# EAGLE board zif_to_dsub (EAGLE 7.2.0)
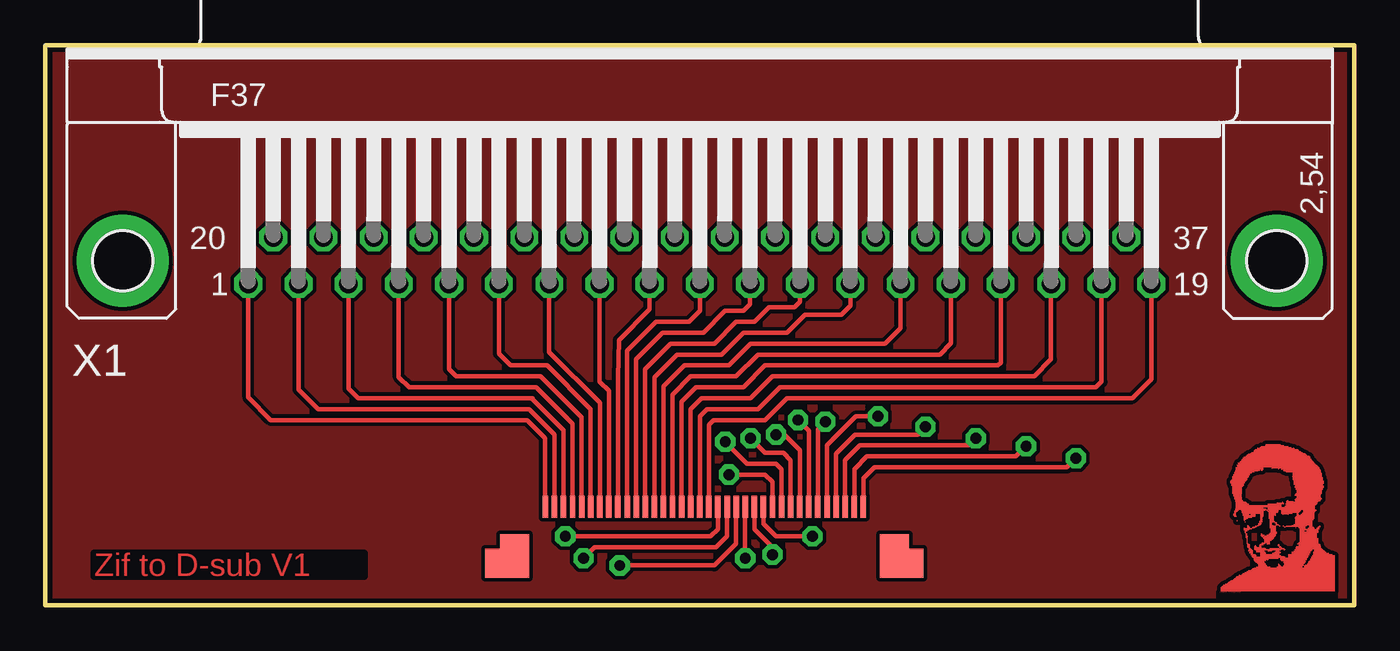
[diagram p0: board, top side]
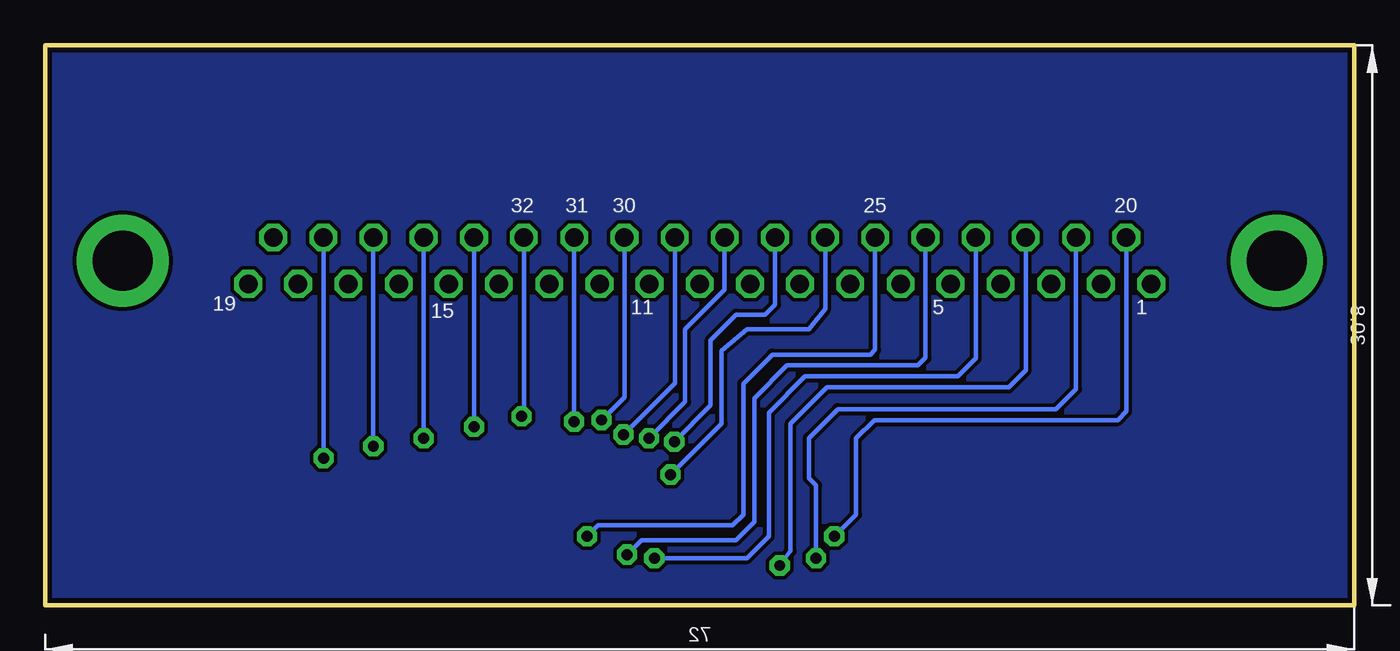
[diagram p1: board, bottom side, seen from below]

Size 72 x 30.8 mm. Coordinates in mm from the lower left corner, seen from the top.
Outline: 0,0 72,0 72,30.8 0,30.8 0,0
Copper layers (1*16): Top 0.035mm / dielectric 1.5mm / Bottom 0.035mm
Design rules "pcbtrain": minimum track width 0.2mm, minimum drill 0.4mm, track to track 0.2mm, track to pad 0.2mm, pad to pad 0.2mm, via to via 0.2mm, smd to smd 0mil, copper to edge 10mil, drill to drill 0.2mm, minimum pad ring 10mil, minimum via ring 10mil, stop-mask expansion 0.125mm, vias tented up to drill 0mil, thermal gap 10mil

## Footprints (pad centres in the part's own frame; a part is rotated, then mirrored left to right if it is on the bottom)
ZIF_CONNECTOR_36 = smd 0.3 x 1.2: P1 -8.5,0; P2 -8,0; P3 -7.5,0; P4 -7,0; P5 -6.5,0; P6 -6,0; P7 -5.5,0; P8 -5,0; P9 -4.5,0; P10 -4,0; P11 -3.5,0; P12 -3,0; P13 -2.5,0; P14 -2,0; P15 -1.5,0; P16 -1,0; P17 -0.5,0; P18 0,0; P19 0.5,0; P20 1,0; P21 1.5,0; P22 2,0; P23 2.5,0; P24 3,0; P25 3.5,0; P26 4,0; P27 4.5,0; P28 5,0; P29 5.5,0; P30 6,0; P31 6.5,0; P32 7,0; P33 7.5,0; P34 8,0; P35 8.5,0; P36 9,0; P$2 0.5,0; P$3 1,0; P$4 1.5,0; P$8 3.5,0; P$10 4.5,0; P$17 -1,0; P$18 -0.5,0; P$19 -2,0; P$20 -1.5,0; P$21 -2.5,0; P$22 -3,0; P$23 -3.5,0; P$24 -4,0; P$25 -4.5,0; P$26 -5,0; P$27 -5.5,0; P$28 -6,0; P$29 -6.5,0; P$30 -7,0; P$31 -7.5,0; P$34 8.5,0; P$36 -8.5,0; P$41 0,0; P$42 0.5,0; P$43 1,0; P$44 1.5,0; P$45 2,0; P$46 2.5,0; P$47 3,0; P$48 3.5,0; P$49 4,0; P$50 4.5,0; P$51 5,0; P$52 5.5,0; P$53 6,0; P$54 6.5,0; P$55 7,0; P$56 7.5,0; P$57 -1,0; P$58 -0.5,0; P$59 -2,0; P$60 -1.5,0; P$61 -2.5,0; P$62 -3,0; P$63 -3.5,0; P$64 -4,0; P$65 -4.5,0; P$66 -5,0; P$67 -5.5,0; P$68 -6,0; P$69 -6.5,0; P$70 -7,0; P$71 -7.5,0; P$72 8,0; P$73 -8,0; P$74 8.5,0; P$75 9,0; P$76 -8.5,0; P$81 0,0; P$85 2,0; P$86 2.5,0; P$87 3,0; P$89 4,0; P$91 5,0; P$92 5.5,0; P$93 6,0; P$94 6.5,0; P$95 7,0; P$96 7.5,0; P$112 8,0; P$113 -8,0; P$115 9,0 | smd 1.6 x 2.4: P$37 10.7,-2.7; P$38 -10.2,-2.7; P$77 10.7,-2.7; P$78 -10.2,-2.7; P$117 10.7,-2.7; P$118 -10.2,-2.7 | smd 0.8 x 1.6: P$39 -11.4,-3.1; P$40 11.9,-3.1; P$79 -11.4,-3.1; P$80 11.9,-3.1; P$119 -11.4,-3.1; P$120 11.9,-3.1
F37HP = drill 1.016 octagon: 1 -24.841,-1.27; 2 -22.073,-1.27; 3 -19.329,-1.27; 4 -16.561,-1.27; 5 -13.792,-1.27; 6 -11.049,-1.27; 7 -8.28,-1.27; 8 -5.512,-1.27; 9 -2.769,-1.27; 10 0,-1.27; 11 2.769,-1.27; 12 5.512,-1.27; 13 8.28,-1.27; 14 11.049,-1.27; 15 13.818,-1.27; 16 16.561,-1.27; 17 19.329,-1.27; 18 22.098,-1.27; 19 24.841,-1.27; 20 -23.47,1.27; 21 -20.701,1.27; 22 -17.932,1.27; 23 -15.189,1.27; 24 -12.421,1.27; 25 -9.652,1.27; 26 -6.909,1.27; 27 -4.14,1.27; 28 -1.372,1.27; 29 1.372,1.27; 30 4.14,1.27; 31 6.909,1.27; 32 9.677,1.27; 33 12.421,1.27; 34 15.189,1.27; 35 17.958,1.27; 36 20.701,1.27; 37 23.47,1.27 | drill 3.302 pad 5.08: G1 -31.75,0; G2 31.75,0

## Placement (x,y rotation side)
U$1  ZIF_CONNECTOR_36  [ZIF_CONNECTOR_36]  36,5.43 0 top
X1  [F37HP]  36,18.96 0 top

## Library data of the parts
U$1 = mayo_parts2
X1 = con-subd; OC_FARNELL: unknown; OC_NEWARK: unknown

## Nets
N$1: U$1.P1 X1.1
N$2: U$1.P2 X1.2
N$3: U$1.P3 X1.3
N$4: U$1.P4 X1.4
N$5: U$1.P5 X1.5
N$6: U$1.P6 X1.6
N$7: U$1.P7 X1.7
N$8: U$1.P8 X1.8
N$9: U$1.P9 X1.9
N$10: U$1.P10 X1.10
N$11: U$1.P11 X1.11
N$12: U$1.P12 X1.12
N$13: U$1.P13 X1.13
N$14: U$1.P14 X1.14
N$15: U$1.P15 X1.15
N$16: U$1.P16 X1.16
N$17: U$1.P17 X1.17
N$18: U$1.P18 X1.18
N$19: U$1.P19 X1.19
N$20: U$1.P20 X1.20
N$21: U$1.P21 X1.21
N$22: U$1.P22 X1.22
N$23: U$1.P23 X1.23
N$24: U$1.P24 X1.24
N$25: U$1.P25 X1.25
N$26: U$1.P26 X1.26
N$27: U$1.P27 X1.27
N$28: U$1.P28 X1.28
N$29: U$1.P29 X1.29
N$30: U$1.P30 X1.30
N$31: U$1.P31 X1.31
N$32: U$1.P32 X1.32
N$33: U$1.P33 X1.33
N$34: U$1.P34 X1.34
N$35: U$1.P35 X1.35
N$36: U$1.P36 X1.36

## Tracks (layer width: path | path; a pad name or v marks a point on that pad's centre or on a via)
N$1
  Top 0.254: U$1.P1 27.5,9.2 26.5,10.2 12.4,10.2 11.16,11.44 X1.1
N$2
  Top 0.254: U$1.P2 28,9.4 26.6,10.8 15,10.8 13.93,11.87 X1.2
N$3
  Top 0.254: U$1.P3 28.5,9.65 26.8,11.35 26.8,11.4 17.2,11.4 16.67,11.93 X1.3
N$4
  Top 0.254: U$1.P4 29,10 27,12 20,12 19.44,12.56 X1.4
N$5
  Top 0.254: U$1.P5 29.5,10.35 27.25,12.6 22.6,12.6 22.21,12.99 X1.5
N$6
  Top 0.254: U$1.P6 30,10.8 27.6,13.2 25.6,13.2 24.95,13.85 X1.6
N$7
  Top 0.254: U$1.P7 30.5,11.15 27.72,13.93 X1.7
N$8
  Top 0.254: U$1.P8 31,11.8 30.49,12.31 X1.8
N$9
  Top 0.254: U$1.P9 31.5,12.55 31.55,14.6 33.23,16.28 X1.9
N$10
  Top 0.254: U$1.P10 32,14 33.6,15.6 35.4,15.6 36,16.2 X1.10
N$11
  Top 0.254: U$1.P11 32.5,13.55 33.95,15 36.2,15 37.4,16.2 38.4,16.2 38.77,16.57 X1.11
N$12
  Top 0.254: U$1.P12 33,13 34.4,14.4 36.8,14.4 38,15.6 39,15.6 39.8,16.4 41.2,16.4 41.51,16.71 X1.12
N$13
  Top 0.254: U$1.P13 33.5,12.55 34.75,13.8 37.2,13.8 38.4,15 40.8,15 41.8,16 43.8,16 44.28,16.48 X1.13
N$14
  Top 0.254: U$1.P14 34,12.05 35.15,13.2 37.6,13.2 38.8,14.4 46.2,14.4 47.05,15.25 X1.14
N$15
  Top 0.254: U$1.P15 34.5,11.6 35.5,12.6 38,12.6 39.2,13.8 49.2,13.8 49.82,14.42 X1.15
N$16
  Top 0.254: U$1.P16 35,11.2 35.8,12 38.4,12 39.6,13.2 52.4,13.2 52.56,13.36 X1.16
N$17
  Top 0.254: U$1.P17 35.5,10.8 36.1,11.4 38.8,11.4 40,12.6 54.4,12.6 55.33,13.53 X1.17
N$18
  Top 0.254: U$1.P18 36,10.4 36.4,10.8 39.2,10.8 40.4,12 57.8,12 58.1,12.3 X1.18
N$19
  Top 0.254: U$1.P19 36.5,9.95 36.75,10.2 39.6,10.2 40.8,11.4 59.8,11.4 60.84,12.44 X1.19
N$20  (via drill 0.6 pad 0.25)
  Top 0.254: U$1.P20 37,4.2 36.6,3.8 v28.6,3.8
  Bottom 0.254: v28.6,3.8 27.4,5 27.4,9.2 26.4,10.2 13,10.2 12.53,10.67 X1.20
N$21  (via drill 0.6 pad 0.25)
  Top 0.254: U$1.P21 37.5,3.8 36.9,3.2 30.2,3.2 v29.6,2.6
  Bottom 0.254: X1.21 15.3,11.9 16.4,10.8 28.4,10.8 30,9.2 30,7 29.6,6.6 v29.6,2.6
N$22  (via drill 0.6 pad 0.25)
  Top 0.254: U$1.P22 38,3.4 36.8,2.2 v31.6,2.2
  Bottom 0.254: v31.6,2.2 31,3 31,10 29,12 19,12 18.07,12.93 X1.22
N$23  (via drill 0.6 pad 0.25)
  Top 0.254: U$1.P23 v38.5,2.6
  Bottom 0.254: v38.5,2.6 33.4,2.6 32.2,3.8 32.2,10.6 30.2,12.6 21.8,12.6 20.81,13.59 X1.23
N$24  (via drill 0.6 pad 0.25)
  Top 0.254: U$1.P24 39,4.2 40,3.2 v40,2.8
  Bottom 0.254: v40,2.8 39.2,3.6 34,3.6 33,4.6 33,11.4 31.2,13.2 24,13.2 23.58,13.62 X1.24
N$25  (via drill 0.6 pad 0.25)
  Top 0.254: U$1.P25 39.5,4.5 40.2,3.8 v42.2,3.8
  Bottom 0.254: v42.2,3.8 41.6,4.4 34.2,4.4 33.6,5 33.6,12.2 32,13.8 26.6,13.8 26.35,14.05 X1.25
N$26  (via drill 0.6 pad 0.25)
  Top 0.254: U$1.P26 40,6.8 39.6,7.2 v37.6,7.2
  Bottom 0.254: v37.6,7.2 34.8,10 34.8,14 33.4,15.2 30,15.2 29.09,16.31 X1.26
N$27  (via drill 0.6 pad 0.25)
  Top 0.254: U$1.P27 40.5,7.5 40.2,7.8 38.6,7.8 v37.4,9
  Bottom 0.254: v37.4,9 35.4,11 35.4,14.6 34,16 32.4,16 31.86,16.54 X1.27
N$28  (via drill 0.6 pad 0.25)
  Top 0.254: U$1.P28 41,8 40.6,8.4 39.6,8.4 v38.8,9.2
  Bottom 0.254: v38.8,9.2 36.8,11.2 36.8,15.2 34.63,17.37 X1.28
N$29  (via drill 0.6 pad 0.25)
  Top 0.254: U$1.P29 41.5,8.55 40.65,9.4 v40.2,9.4
  Bottom 0.254: v40.2,9.4 37.37,12.23 X1.29
N$30  (via drill 0.6 pad 0.25)
  Top 0.254: U$1.P30 42,9.6 v41.4,10.2
  Bottom 0.254: v41.4,10.2 40.14,11.46 X1.30
N$31  (via drill 0.6 pad 0.25)
  Top 0.254: U$1.P31 42.5,9.7 v42.91,10.11
  Bottom 0.254: v42.91,10.11 X1.31
N$32  (via drill 0.6 pad 0.25)
  Top 0.254: U$1.P32 43,8.8 44.6,10.4 v45.8,10.4
  Bottom 0.254: v45.8,10.4 45.68,10.52 X1.32
N$33  (via drill 0.6 pad 0.25)
  Top 0.254: U$1.P33 43.5,8.35 44.55,9.4 48,9.4 v48.42,9.82
  Bottom 0.254: v48.42,9.82 X1.33
N$34  (via drill 0.6 pad 0.25)
  Top 0.254: U$1.P34 44,8 44.8,8.8 50.8,8.8 v51.19,9.19
  Bottom 0.254: v51.19,9.19 X1.34
N$35  (via drill 0.6 pad 0.25)
  Top 0.254: U$1.P35 44.5,7.5 45.2,8.2 53.4,8.2 v53.96,8.76
  Bottom 0.254: v53.96,8.76 X1.35
N$36  (via drill 0.6 pad 0.25)
  Top 0.254: U$1.P36 45,7 45.6,7.6 56.2,7.6 v56.7,8.1
  Bottom 0.254: v56.7,8.1 X1.36
N$37
  pour Bottom: 0,30.8 72,30.8 72,-0.2 0,-0.2
N$38
  pour Top: 0,30.8 72,30.8 72,0 0,0 0,30.6
(copper drawn outside any net)
  shapes: Top area x1270

## Text on the board
Top: Zif to D-sub V1 | C:/EAGLE-7.2.0/bigd2.bmp
bNames: 20 | 25 | 30 | 31 | 32 | 1 | 5 | 11 | 19 | 15